# Altium PCB ServoShield.PcbDoc (part 2 of 3)
Units mm, origin at the board's own origin, x right, y up, seen from the top; angles counter-clockwise.
Board outline 82.5 x 82.5 mm, 2 copper layers (Top Layer, Bottom Layer); 43 components, 112 nets, 281 pads, 5423 vias.
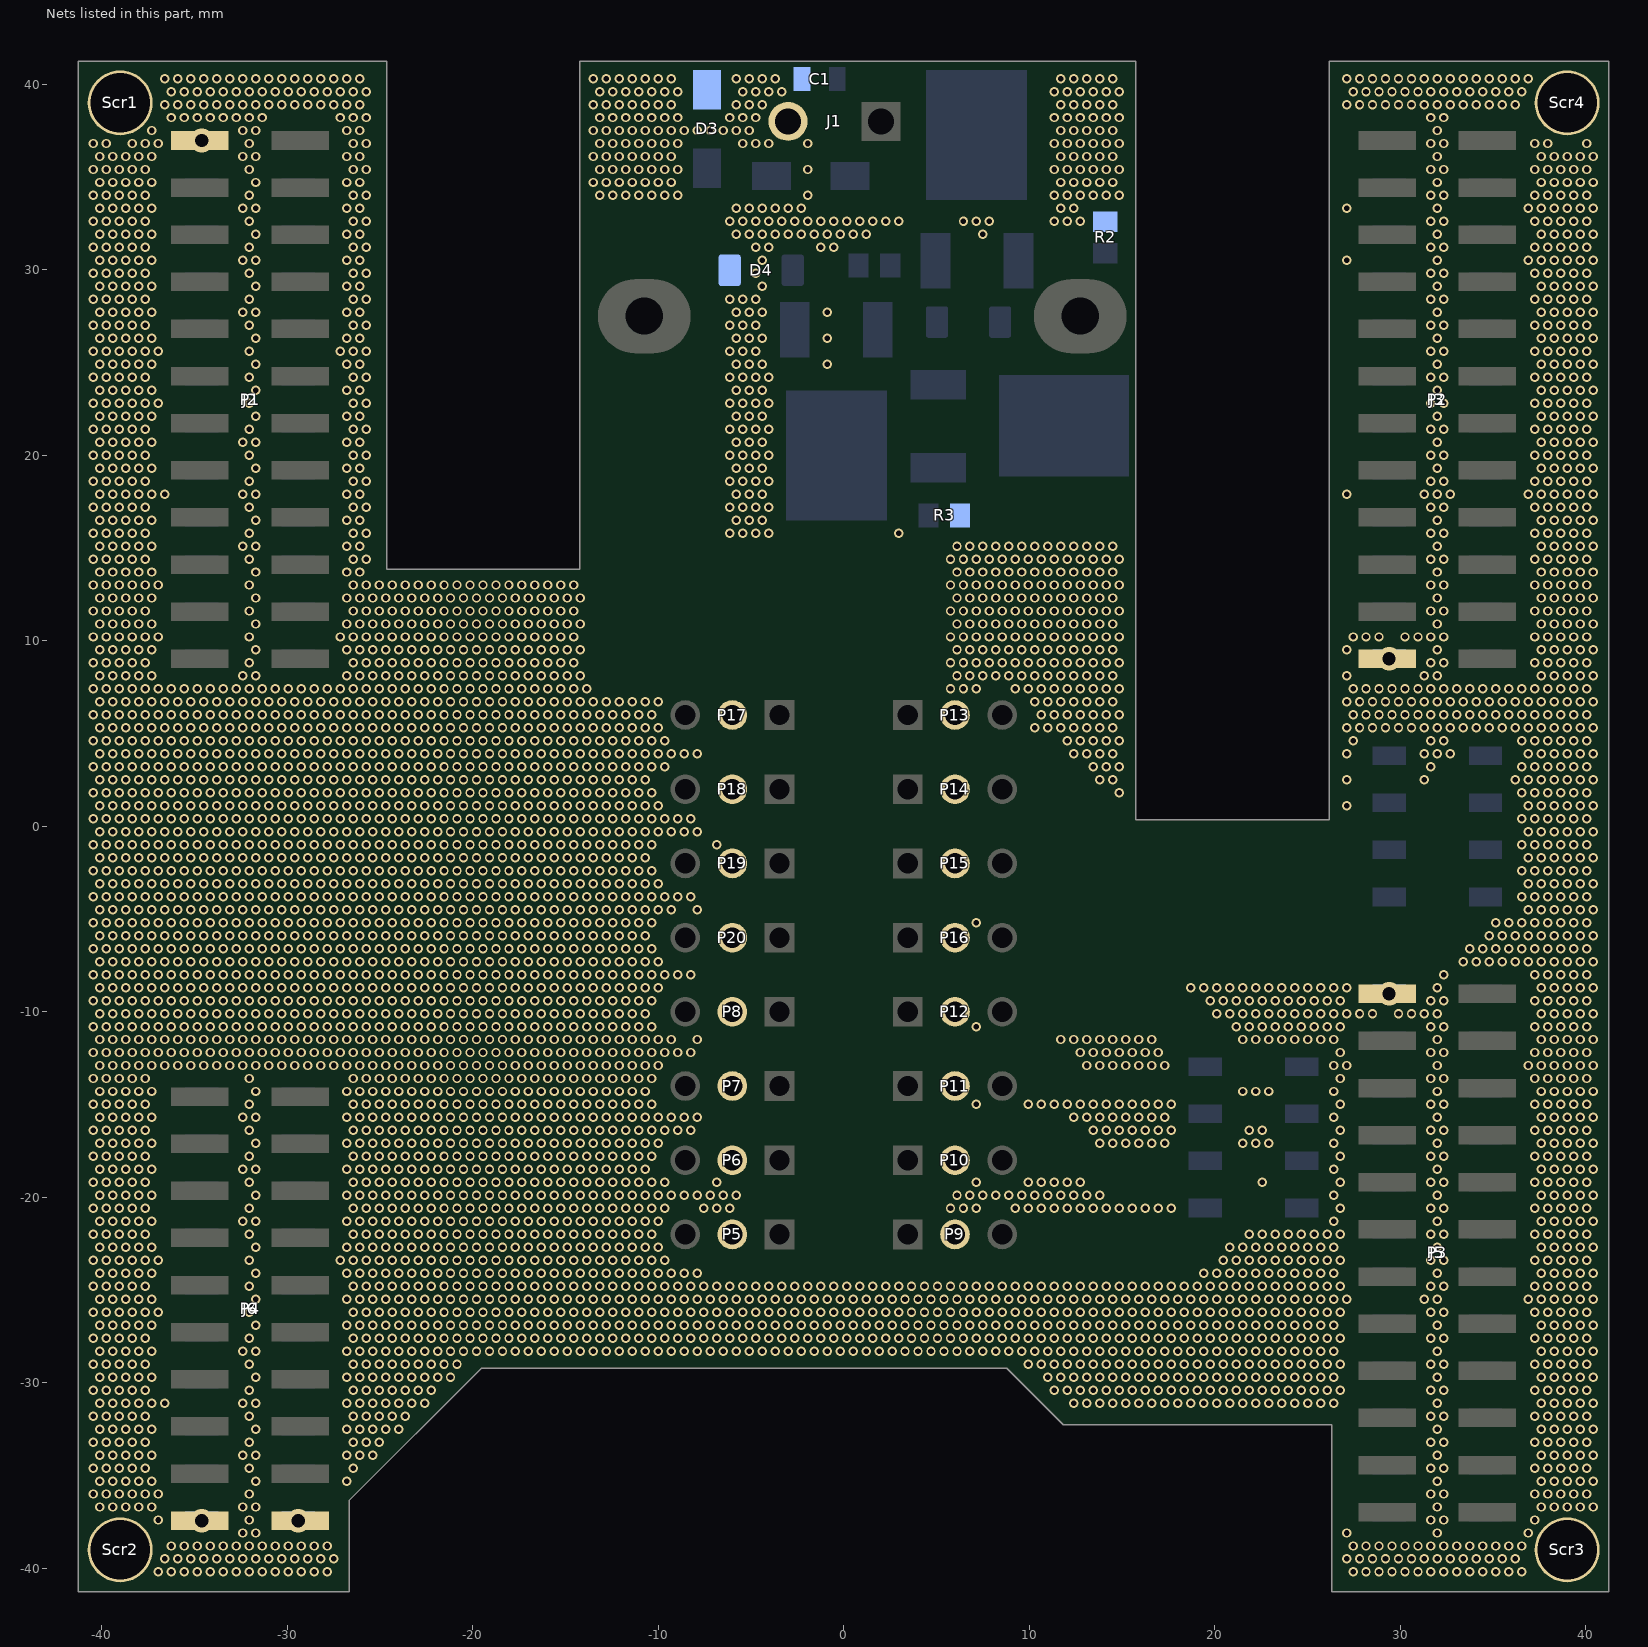
[diagram p2: the nets of this part, all layers, seen from the top]

## Via types
v1: diameter 0.508, hole 0.3, Top Layer to Bottom Layer, tented both sides, 5315 vias
v2: diameter 1.27, hole 0.711, Top Layer to Bottom Layer, 108 vias

## Nets (pads, with @x,y where several pads share a name; then routed paths per layer and width w, separated by ;. In a path a pad name is that pad's centre, name@x,y a point inside that pad or via, vN(x,y) a via of type N, cw(c..) or ccw(c..) an arc to the next point about the centre after c; other vN are vias at no path point) (continued)
GND: (continued)
  other v1: -36.943,-40.193 -36.243,-40.193 -35.543,-40.193 -34.843,-40.193 -34.143,-40.193 -33.443,-40.193 -32.743,-40.193 -32.043,-40.193 -31.343,-40.193 -30.643,-40.193 -29.943,-40.193 -29.243,-40.193 -28.543,-40.193 -27.843,-40.193 27.457,-40.193 28.157,-40.193 28.857,-40.193 29.557,-40.193 30.257,-40.193 30.957,-40.193 31.657,-40.193 32.357,-40.193 33.057,-40.193 33.757,-40.193 34.457,-40.193 35.157,-40.193 35.857,-40.193 36.557,-40.193 -36.593,-39.493 -35.893,-39.493 -35.193,-39.493 -34.493,-39.493 -33.793,-39.493 -33.093,-39.493 -32.393,-39.493 -31.693,-39.493 -30.993,-39.493 -30.293,-39.493 -29.593,-39.493 -28.893,-39.493 -28.193,-39.493 -27.493,-39.493 27.107,-39.493 27.807,-39.493 28.507,-39.493 29.207,-39.493 29.907,-39.493 30.607,-39.493 31.307,-39.493 32.007,-39.493 32.707,-39.493 33.407,-39.493 34.107,-39.493 34.807,-39.493 35.507,-39.493 36.207,-39.493 -36.243,-38.793 -35.543,-38.793 -34.843,-38.793 -34.143,-38.793 -33.443,-38.793 -32.743,-38.793 -32.043,-38.793 -31.343,-38.793 -30.643,-38.793 -29.943,-38.793 -29.243,-38.793 -28.543,-38.793 -27.843,-38.793 27.457,-38.793 28.157,-38.793 28.857,-38.793 29.557,-38.793 30.257,-38.793 30.957,-38.793 31.657,-38.793 32.357,-38.793 33.057,-38.793 33.757,-38.793 34.457,-38.793 35.157,-38.793 35.857,-38.793 36.557,-38.793 -32.393,-38.093 -31.693,-38.093 27.107,-38.093 32.007,-38.093 36.907,-38.093 -36.943,-37.393 -32.043,-37.393 31.657,-37.393 32.357,-37.393 37.257,-37.393 -40.093,-36.693 -39.393,-36.693 -38.693,-36.693 -37.993,-36.693 -37.293,-36.693 -32.393,-36.693 -31.693,-36.693 32.007,-36.693 37.607,-36.693 38.307,-36.693 39.007,-36.693 39.707,-36.693 40.407,-36.693 -40.443,-35.993 -39.743,-35.993 -39.043,-35.993 -38.343,-35.993 -37.643,-35.993 -36.943,-35.993 -32.043,-35.993 31.657,-35.993 32.357,-35.993 37.257,-35.993 37.957,-35.993 38.657,-35.993 39.357,-35.993 40.057,-35.993 -40.093,-35.293 -39.393,-35.293 -38.693,-35.293 -37.993,-35.293 -37.293,-35.293 -31.693,-35.293 -26.793,-35.293 32.007,-35.293 37.607,-35.293 38.307,-35.293 39.007,-35.293 39.707,-35.293 40.407,-35.293 -40.443,-34.593 -39.743,-34.593 -39.043,-34.593 -38.343,-34.593 -37.643,-34.593 -32.043,-34.593 -26.443,-34.593 31.657,-34.593 32.357,-34.593 37.257,-34.593 37.957,-34.593 38.657,-34.593 39.357,-34.593 40.057,-34.593 -40.093,-33.893 -39.393,-33.893 -38.693,-33.893 -37.993,-33.893 -37.293,-33.893 -32.393,-33.893 -31.693,-33.893 -26.793,-33.893 -26.093,-33.893 -25.393,-33.893 32.007,-33.893 37.607,-33.893 38.307,-33.893 39.007,-33.893 39.707,-33.893 40.407,-33.893 -40.443,-33.193 -39.743,-33.193 -39.043,-33.193 -38.343,-33.193 -37.643,-33.193 -32.043,-33.193 -26.443,-33.193 -25.743,-33.193 -25.043,-33.193 31.657,-33.193 32.357,-33.193 37.257,-33.193 37.957,-33.193 38.657,-33.193 39.357,-33.193 40.057,-33.193 -40.093,-32.493 -39.393,-32.493 -38.693,-32.493 -37.993,-32.493 -37.293,-32.493 -31.693,-32.493 -26.793,-32.493 -26.093,-32.493 -25.393,-32.493 -24.693,-32.493 -23.993,-32.493 32.007,-32.493 37.607,-32.493 38.307,-32.493 39.007,-32.493 39.707,-32.493 40.407,-32.493 -40.443,-31.793 -39.743,-31.793 -39.043,-31.793 -38.343,-31.793 -37.643,-31.793 -32.043,-31.793 -26.443,-31.793 -25.743,-31.793 -25.043,-31.793 -24.343,-31.793 -23.643,-31.793 31.657,-31.793 32.357,-31.793 37.257,-31.793 37.957,-31.793 38.657,-31.793 39.357,-31.793 40.057,-31.793 -40.093,-31.093 -39.393,-31.093 -38.693,-31.093 -37.993,-31.093 -37.293,-31.093 -36.593,-31.093 -32.393,-31.093 -31.693,-31.093 -26.793,-31.093 -26.093,-31.093 -25.393,-31.093 -24.693,-31.093 -23.993,-31.093 -23.293,-31.093 -22.593,-31.093 12.407,-31.093 13.107,-31.093 13.807,-31.093 14.507,-31.093 15.207,-31.093 15.907,-31.093 16.607,-31.093 17.307,-31.093 18.007,-31.093 18.707,-31.093 19.407,-31.093 20.107,-31.093 20.807,-31.093 21.507,-31.093 22.207,-31.093 22.907,-31.093 23.607,-31.093 24.307,-31.093 25.007,-31.093 25.707,-31.093 26.407,-31.093 32.007,-31.093 37.607,-31.093 38.307,-31.093 39.007,-31.093 39.707,-31.093 40.407,-31.093 -40.443,-30.393 -39.743,-30.393 -39.043,-30.393 -38.343,-30.393 -37.643,-30.393 -32.043,-30.393 -26.443,-30.393 -25.743,-30.393 -25.043,-30.393 -24.343,-30.393 -23.643,-30.393 -22.943,-30.393 -22.243,-30.393 11.357,-30.393 12.057,-30.393 12.757,-30.393 13.457,-30.393 14.157,-30.393 14.857,-30.393 15.557,-30.393 16.257,-30.393 16.957,-30.393 17.657,-30.393 18.357,-30.393 19.057,-30.393 19.757,-30.393 20.457,-30.393 21.157,-30.393 21.857,-30.393 22.557,-30.393 23.257,-30.393 23.957,-30.393 24.657,-30.393 25.357,-30.393 26.057,-30.393 26.757,-30.393 31.657,-30.393 32.357,-30.393 37.257,-30.393 37.957,-30.393 38.657,-30.393 39.357,-30.393 40.057,-30.393 -40.093,-29.693 -39.393,-29.693 -38.693,-29.693 -37.993,-29.693 -37.293,-29.693 -31.693,-29.693 -26.793,-29.693 -26.093,-29.693 -25.393,-29.693 -24.693,-29.693 -23.993,-29.693 -23.293,-29.693 -22.593,-29.693 -21.893,-29.693 -21.193,-29.693 11.007,-29.693 11.707,-29.693 12.407,-29.693 13.107,-29.693 13.807,-29.693 14.507,-29.693 15.207,-29.693 15.907,-29.693 16.607,-29.693 17.307,-29.693 18.007,-29.693 18.707,-29.693 19.407,-29.693 20.107,-29.693 20.807,-29.693 21.507,-29.693 22.207,-29.693 22.907,-29.693 23.607,-29.693 24.307,-29.693 25.007,-29.693 25.707,-29.693 26.407,-29.693 32.007,-29.693 37.607,-29.693 38.307,-29.693 39.007,-29.693 39.707,-29.693 40.407,-29.693 -40.443,-28.993 -39.743,-28.993 -39.043,-28.993 -38.343,-28.993 -37.643,-28.993 -32.043,-28.993 -26.443,-28.993 -25.743,-28.993 -25.043,-28.993 -24.343,-28.993 -23.643,-28.993 -22.943,-28.993 -22.243,-28.993 -21.543,-28.993 -20.843,-28.993 9.957,-28.993 10.657,-28.993 11.357,-28.993 12.057,-28.993 12.757,-28.993 13.457,-28.993 14.157,-28.993 14.857,-28.993 15.557,-28.993 16.257,-28.993 16.957,-28.993 17.657,-28.993 18.357,-28.993 19.057,-28.993 19.757,-28.993 20.457,-28.993 21.157,-28.993 21.857,-28.993 22.557,-28.993 23.257,-28.993 23.957,-28.993 24.657,-28.993 25.357,-28.993 26.057,-28.993 26.757,-28.993 31.657,-28.993 32.357,-28.993 37.257,-28.993 37.957,-28.993 38.657,-28.993 39.357,-28.993 40.057,-28.993 -40.093,-28.293 -39.393,-28.293 -38.693,-28.293 -37.993,-28.293 -37.293,-28.293 -32.393,-28.293 -31.693,-28.293 -26.793,-28.293 -26.093,-28.293 -25.393,-28.293 -24.693,-28.293 -23.993,-28.293 -23.293,-28.293 -22.593,-28.293 -21.893,-28.293 -21.193,-28.293 -20.493,-28.293 -19.793,-28.293 -19.093,-28.293 -18.393,-28.293 -17.693,-28.293 -16.993,-28.293 -16.293,-28.293 -15.593,-28.293 -14.893,-28.293 -14.193,-28.293 -13.493,-28.293 -12.793,-28.293 -12.093,-28.293 -11.393,-28.293 -10.693,-28.293 -9.993,-28.293 -9.293,-28.293 -8.593,-28.293 -7.893,-28.293 -7.193,-28.293 -6.493,-28.293 -5.793,-28.293 -5.093,-28.293 -4.393,-28.293 -3.693,-28.293 -2.993,-28.293 -2.293,-28.293 -1.593,-28.293 -0.893,-28.293 -0.193,-28.293 0.507,-28.293 1.207,-28.293 1.907,-28.293 2.607,-28.293 3.307,-28.293 4.007,-28.293 4.707,-28.293 5.407,-28.293 6.107,-28.293 6.807,-28.293 7.507,-28.293 8.207,-28.293 8.907,-28.293 9.607,-28.293 10.307,-28.293 11.007,-28.293 11.707,-28.293 12.407,-28.293 13.107,-28.293 13.807,-28.293 14.507,-28.293 15.207,-28.293 15.907,-28.293 16.607,-28.293 17.307,-28.293 18.007,-28.293 18.707,-28.293 19.407,-28.293 20.107,-28.293 20.807,-28.293 21.507,-28.293 22.207,-28.293 22.907,-28.293 23.607,-28.293 24.307,-28.293 25.007,-28.293 25.707,-28.293 26.407,-28.293 32.007,-28.293 37.607,-28.293 38.307,-28.293 39.007,-28.293 39.707,-28.293 40.407,-28.293 -40.443,-27.593 -39.743,-27.593 -39.043,-27.593 -38.343,-27.593 -37.643,-27.593 -32.043,-27.593 -26.443,-27.593 -25.743,-27.593 -25.043,-27.593 -24.343,-27.593 -23.643,-27.593 -22.943,-27.593 -22.243,-27.593 -21.543,-27.593 -20.843,-27.593 -20.143,-27.593 -19.443,-27.593 -18.743,-27.593 -18.043,-27.593 -17.343,-27.593 -16.643,-27.593 -15.943,-27.593 -15.243,-27.593 -14.543,-27.593 -13.843,-27.593 -13.143,-27.593 -12.443,-27.593 -11.743,-27.593 -11.043,-27.593 -10.343,-27.593 -9.643,-27.593 -8.943,-27.593 -8.243,-27.593 -7.543,-27.593 -6.843,-27.593 -6.143,-27.593 -5.443,-27.593 -4.743,-27.593 -4.043,-27.593 -3.343,-27.593 -2.643,-27.593 -1.943,-27.593 -1.243,-27.593 -0.543,-27.593 0.157,-27.593 0.857,-27.593 1.557,-27.593 2.257,-27.593 2.957,-27.593 3.657,-27.593 4.357,-27.593 5.057,-27.593 5.757,-27.593 6.457,-27.593 7.157,-27.593 7.857,-27.593 8.557,-27.593 9.257,-27.593 9.957,-27.593 10.657,-27.593 11.357,-27.593 12.057,-27.593 12.757,-27.593 13.457,-27.593 14.157,-27.593 14.857,-27.593 15.557,-27.593 16.257,-27.593 16.957,-27.593 17.657,-27.593 18.357,-27.593 19.057,-27.593 19.757,-27.593 20.457,-27.593 21.157,-27.593 21.857,-27.593 22.557,-27.593 23.257,-27.593 23.957,-27.593 24.657,-27.593 25.357,-27.593 26.057,-27.593 26.757,-27.593 31.657,-27.593 32.357,-27.593 37.257,-27.593 37.957,-27.593 38.657,-27.593 39.357,-27.593 40.057,-27.593 -40.093,-26.893 -39.393,-26.893 -38.693,-26.893 -37.993,-26.893 -37.293,-26.893 -31.693,-26.893 -26.793,-26.893 -26.093,-26.893 -25.393,-26.893 -24.693,-26.893 -23.993,-26.893 -23.293,-26.893 -22.593,-26.893 -21.893,-26.893 -21.193,-26.893 -20.493,-26.893 -19.793,-26.893 -19.093,-26.893 -18.393,-26.893 -17.693,-26.893 -16.993,-26.893 -16.293,-26.893 -15.593,-26.893 -14.893,-26.893 -14.193,-26.893 -13.493,-26.893 -12.793,-26.893 -12.093,-26.893 -11.393,-26.893 -10.693,-26.893 -9.993,-26.893 -9.293,-26.893 -8.593,-26.893 -7.893,-26.893 -7.193,-26.893 -6.493,-26.893 -5.793,-26.893 -5.093,-26.893 -4.393,-26.893 -3.693,-26.893 -2.993,-26.893 -2.293,-26.893 -1.593,-26.893 -0.893,-26.893 -0.193,-26.893 0.507,-26.893 1.207,-26.893 1.907,-26.893 2.607,-26.893 3.307,-26.893 4.007,-26.893 4.707,-26.893 5.407,-26.893 6.107,-26.893 6.807,-26.893 7.507,-26.893 8.207,-26.893 8.907,-26.893 9.607,-26.893 10.307,-26.893 11.007,-26.893 11.707,-26.893 12.407,-26.893 13.107,-26.893 13.807,-26.893 14.507,-26.893 15.207,-26.893 15.907,-26.893 16.607,-26.893 17.307,-26.893 18.007,-26.893 18.707,-26.893 19.407,-26.893 20.107,-26.893 20.807,-26.893 21.507,-26.893 22.207,-26.893 22.907,-26.893 23.607,-26.893 24.307,-26.893 25.007,-26.893 25.707,-26.893 26.407,-26.893 32.007,-26.893 37.607,-26.893 38.307,-26.893 39.007,-26.893 39.707,-26.893 40.407,-26.893 -40.443,-26.193 -39.743,-26.193 -39.043,-26.193 -38.343,-26.193 -37.643,-26.193 -36.943,-26.193 -32.043,-26.193 -26.443,-26.193 -25.743,-26.193 -25.043,-26.193 -24.343,-26.193 -23.643,-26.193 -22.943,-26.193 -22.243,-26.193 -21.543,-26.193 -20.843,-26.193 -20.143,-26.193 -19.443,-26.193 -18.743,-26.193 -18.043,-26.193 -17.343,-26.193 -16.643,-26.193 -15.943,-26.193 -15.243,-26.193 -14.543,-26.193 -13.843,-26.193 -13.143,-26.193 -12.443,-26.193 -11.743,-26.193 -11.043,-26.193 -10.343,-26.193 -9.643,-26.193 -8.943,-26.193 -8.243,-26.193 -7.543,-26.193 -6.843,-26.193 -6.143,-26.193 -5.443,-26.193 -4.743,-26.193 -4.043,-26.193 -3.343,-26.193 -2.643,-26.193 -1.943,-26.193 -1.243,-26.193 -0.543,-26.193 0.157,-26.193 0.857,-26.193 1.557,-26.193 2.257,-26.193 2.957,-26.193 3.657,-26.193 4.357,-26.193 5.057,-26.193 5.757,-26.193 6.457,-26.193 7.157,-26.193 7.857,-26.193 8.557,-26.193 9.257,-26.193 9.957,-26.193 10.657,-26.193 11.357,-26.193 12.057,-26.193 12.757,-26.193 13.457,-26.193 14.157,-26.193 14.857,-26.193 15.557,-26.193 16.257,-26.193 16.957,-26.193 17.657,-26.193 18.357,-26.193 19.057,-26.193 19.757,-26.193 20.457,-26.193 21.157,-26.193 21.857,-26.193 22.557,-26.193 23.257,-26.193 23.957,-26.193 24.657,-26.193 25.357,-26.193 26.057,-26.193 26.757,-26.193 31.657,-26.193 32.357,-26.193 37.257,-26.193 37.957,-26.193 38.657,-26.193 39.357,-26.193 40.057,-26.193 -40.093,-25.493 -39.393,-25.493 -38.693,-25.493 -37.993,-25.493 -37.293,-25.493 -31.693,-25.493 -26.793,-25.493 -26.093,-25.493 -25.393,-25.493 -24.693,-25.493 -23.993,-25.493 -23.293,-25.493 -22.593,-25.493 -21.893,-25.493 -21.193,-25.493 -20.493,-25.493 -19.793,-25.493 -19.093,-25.493 -18.393,-25.493 -17.693,-25.493 -16.993,-25.493 -16.293,-25.493 -15.593,-25.493 -14.893,-25.493 -14.193,-25.493 -13.493,-25.493 -12.793,-25.493 -12.093,-25.493 -11.393,-25.493 -10.693,-25.493 -9.993,-25.493 -9.293,-25.493 -8.593,-25.493 -7.893,-25.493 -7.193,-25.493 -6.493,-25.493 -5.793,-25.493 -5.093,-25.493 -4.393,-25.493 -3.693,-25.493 -2.993,-25.493 -2.293,-25.493 -1.593,-25.493 -0.893,-25.493 -0.193,-25.493 0.507,-25.493 1.207,-25.493 1.907,-25.493 2.607,-25.493 3.307,-25.493 4.007,-25.493 4.707,-25.493 5.407,-25.493 6.107,-25.493 6.807,-25.493 7.507,-25.493 8.207,-25.493 8.907,-25.493 9.607,-25.493 10.307,-25.493 11.007,-25.493 11.707,-25.493 12.407,-25.493 13.107,-25.493 13.807,-25.493 14.507,-25.493 15.207,-25.493 15.907,-25.493 16.607,-25.493 17.307,-25.493 18.007,-25.493 18.707,-25.493 19.407,-25.493 20.107,-25.493 20.807,-25.493 21.507,-25.493 22.207,-25.493 22.907,-25.493 23.607,-25.493 24.307,-25.493 25.007,-25.493 25.707,-25.493 26.407,-25.493 27.107,-25.493 31.307,-25.493 32.007,-25.493 36.907,-25.493 37.607,-25.493 38.307,-25.493 39.007,-25.493 39.707,-25.493 40.407,-25.493 -40.443,-24.793 -39.743,-24.793 -39.043,-24.793 -38.343,-24.793 -37.643,-24.793 -32.043,-24.793 -26.443,-24.793 -25.743,-24.793 -25.043,-24.793 -24.343,-24.793 -23.643,-24.793 -22.943,-24.793 -22.243,-24.793 -21.543,-24.793 -20.843,-24.793 -20.143,-24.793 -19.443,-24.793 -18.743,-24.793 -18.043,-24.793 -17.343,-24.793 -16.643,-24.793 -15.943,-24.793 -15.243,-24.793 -14.543,-24.793 -13.843,-24.793 -13.143,-24.793 -12.443,-24.793 -11.743,-24.793 -11.043,-24.793 -10.343,-24.793 -9.643,-24.793 -8.943,-24.793 -8.243,-24.793 -7.543,-24.793 -6.843,-24.793 -6.143,-24.793 -5.443,-24.793 -4.743,-24.793 -4.043,-24.793 -3.343,-24.793 -2.643,-24.793 -1.943,-24.793 -1.243,-24.793 -0.543,-24.793 0.157,-24.793 0.857,-24.793 1.557,-24.793 2.257,-24.793 2.957,-24.793 3.657,-24.793 4.357,-24.793 5.057,-24.793 5.757,-24.793 6.457,-24.793 7.157,-24.793 7.857,-24.793 8.557,-24.793 9.257,-24.793 9.957,-24.793 10.657,-24.793 11.357,-24.793 12.057,-24.793 12.757,-24.793 13.457,-24.793 14.157,-24.793 14.857,-24.793 15.557,-24.793 16.257,-24.793 16.957,-24.793 17.657,-24.793 18.357,-24.793 19.057,-24.793 19.757,-24.793 20.457,-24.793 21.157,-24.793 21.857,-24.793 22.557,-24.793 23.257,-24.793 23.957,-24.793 24.657,-24.793 25.357,-24.793 26.057,-24.793 26.757,-24.793 31.657,-24.793 32.357,-24.793 37.257,-24.793 37.957,-24.793 38.657,-24.793 39.357,-24.793 40.057,-24.793 -40.093,-24.093 -39.393,-24.093 -38.693,-24.093 -37.993,-24.093 -37.293,-24.093 -31.693,-24.093 -26.793,-24.093 -26.093,-24.093 -25.393,-24.093 -24.693,-24.093 -23.993,-24.093 -23.293,-24.093 -22.593,-24.093 -21.893,-24.093 -21.193,-24.093 -20.493,-24.093 -19.793,-24.093 -19.093,-24.093 -18.393,-24.093 -17.693,-24.093 -16.993,-24.093 -16.293,-24.093 -15.593,-24.093 -14.893,-24.093 -14.193,-24.093 -13.493,-24.093 -12.793,-24.093 -12.093,-24.093 -11.393,-24.093 -10.693,-24.093 -9.993,-24.093 -9.293,-24.093 -8.593,-24.093 -7.893,-24.093 19.407,-24.093 20.107,-24.093 20.807,-24.093 21.507,-24.093 22.207,-24.093 22.907,-24.093 23.607,-24.093 24.307,-24.093 25.007,-24.093 25.707,-24.093 26.407,-24.093 32.007,-24.093 37.607,-24.093 38.307,-24.093 39.007,-24.093 39.707,-24.093 40.407,-24.093 -40.443,-23.393 -39.743,-23.393 -39.043,-23.393 -38.343,-23.393 -37.643,-23.393 -36.943,-23.393 -32.043,-23.393 -27.143,-23.393 -26.443,-23.393 -25.743,-23.393 -25.043,-23.393 -24.343,-23.393 -23.643,-23.393 -22.943,-23.393 -22.243,-23.393 -21.543,-23.393 -20.843,-23.393 -20.143,-23.393 -19.443,-23.393 -18.743,-23.393 -18.043,-23.393 -17.343,-23.393 -16.643,-23.393 -15.943,-23.393 -15.243,-23.393 -14.543,-23.393 -13.843,-23.393 -13.143,-23.393 -12.443,-23.393 -11.743,-23.393 -11.043,-23.393 -10.343,-23.393 -9.643,-23.393 20.457,-23.393 21.157,-23.393 21.857,-23.393 22.557,-23.393 23.257,-23.393 23.957,-23.393 24.657,-23.393 25.357,-23.393 26.057,-23.393 26.757,-23.393 31.657,-23.393 32.357,-23.393 37.257,-23.393 37.957,-23.393 38.657,-23.393 39.357,-23.393 40.057,-23.393 -40.093,-22.693 -39.393,-22.693 -38.693,-22.693 -37.993,-22.693 -37.293,-22.693 -31.693,-22.693 -26.793,-22.693 -26.093,-22.693 -25.393,-22.693 -24.693,-22.693 -23.993,-22.693 -23.293,-22.693 -22.593,-22.693 -21.893,-22.693 -21.193,-22.693 -20.493,-22.693 -19.793,-22.693 -19.093,-22.693 -18.393,-22.693 -17.693,-22.693 -16.993,-22.693 -16.293,-22.693 -15.593,-22.693 -14.893,-22.693 -14.193,-22.693 -13.493,-22.693 -12.793,-22.693 -12.093,-22.693 -11.393,-22.693 -10.693,-22.693 -9.993,-22.693 20.807,-22.693 21.507,-22.693 22.207,-22.693 22.907,-22.693 23.607,-22.693 24.307,-22.693 25.007,-22.693 25.707,-22.693 26.407,-22.693 32.007,-22.693 37.607,-22.693 38.307,-22.693 39.007,-22.693 39.707,-22.693 40.407,-22.693 -40.443,-21.993 -39.743,-21.993 -39.043,-21.993 -38.343,-21.993 -37.643,-21.993 -32.043,-21.993 -26.443,-21.993 -25.743,-21.993 -25.043,-21.993 -24.343,-21.993 -23.643,-21.993 -22.943,-21.993 -22.243,-21.993 -21.543,-21.993 -20.843,-21.993 -20.143,-21.993 -19.443,-21.993 -18.743,-21.993 -18.043,-21.993 -17.343,-21.993 -16.643,-21.993 -15.943,-21.993 -15.243,-21.993 -14.543,-21.993 -13.843,-21.993 -13.143,-21.993 -12.443,-21.993 -11.743,-21.993 -11.043,-21.993 -10.343,-21.993 21.857,-21.993 22.557,-21.993 23.257,-21.993 23.957,-21.993 24.657,-21.993 25.357,-21.993 26.057,-21.993 26.757,-21.993 31.657,-21.993 32.357,-21.993 37.257,-21.993 37.957,-21.993 38.657,-21.993 39.357,-21.993 40.057,-21.993 -40.093,-21.293 -39.393,-21.293 -38.693,-21.293 -37.993,-21.293 -37.293,-21.293 -32.393,-21.293 -31.693,-21.293 -26.793,-21.293 -26.093,-21.293 -25.393,-21.293 -24.693,-21.293 -23.993,-21.293 -23.293,-21.293 -22.593,-21.293 -21.893,-21.293 -21.193,-21.293 -20.493,-21.293 -19.793,-21.293 -19.093,-21.293 -18.393,-21.293 -17.693,-21.293 -16.993,-21.293 -16.293,-21.293 -15.593,-21.293 -14.893,-21.293 -14.193,-21.293 -13.493,-21.293 -12.793,-21.293 -12.093,-21.293 -11.393,-21.293 -10.693,-21.293 -9.993,-21.293 26.407,-21.293 32.007,-21.293 37.607,-21.293 38.307,-21.293 39.007,-21.293 39.707,-21.293 40.407,-21.293 -40.443,-20.593 -39.743,-20.593 -39.043,-20.593 -38.343,-20.593 -37.643,-20.593 -32.043,-20.593 -26.443,-20.593 -25.743,-20.593 -25.043,-20.593 -24.343,-20.593 -23.643,-20.593 -22.943,-20.593 -22.243,-20.593 -21.543,-20.593 -20.843,-20.593 -20.143,-20.593 -19.443,-20.593 -18.743,-20.593 -18.043,-20.593 -17.343,-20.593 -16.643,-20.593 -15.943,-20.593 -15.243,-20.593 -14.543,-20.593 -13.843,-20.593 -13.143,-20.593 -12.443,-20.593 -11.743,-20.593 -11.043,-20.593 -10.343,-20.593 -9.643,-20.593 -7.543,-20.593 -6.843,-20.593 -6.143,-20.593 5.757,-20.593 6.457,-20.593 7.157,-20.593 9.257,-20.593 9.957,-20.593 10.657,-20.593 11.357,-20.593 12.057,-20.593 12.757,-20.593 13.457,-20.593 14.157,-20.593 14.857,-20.593 15.557,-20.593 16.257,-20.593 16.957,-20.593 17.657,-20.593 26.757,-20.593 31.657,-20.593 32.357,-20.593 37.257,-20.593 37.957,-20.593 38.657,-20.593 39.357,-20.593 40.057,-20.593 -40.093,-19.893 -39.393,-19.893 -38.693,-19.893 -37.993,-19.893 -37.293,-19.893 -31.693,-19.893 -26.793,-19.893 -26.093,-19.893 -25.393,-19.893 -24.693,-19.893 -23.993,-19.893 -23.293,-19.893 -22.593,-19.893 -21.893,-19.893 -21.193,-19.893 -20.493,-19.893 -19.793,-19.893 -19.093,-19.893 -18.393,-19.893 -17.693,-19.893 -16.993,-19.893 -16.293,-19.893 -15.593,-19.893 -14.893,-19.893 -14.193,-19.893 -13.493,-19.893 -12.793,-19.893 -12.093,-19.893 -11.393,-19.893 -10.693,-19.893 -9.993,-19.893 -9.293,-19.893 -8.593,-19.893 -7.893,-19.893 -7.193,-19.893 -6.493,-19.893 -5.793,-19.893 6.107,-19.893 6.807,-19.893 7.507,-19.893 8.207,-19.893 8.907,-19.893 9.607,-19.893 10.307,-19.893 11.007,-19.893 11.707,-19.893 12.407,-19.893 13.107,-19.893 13.807,-19.893 26.407,-19.893 32.007,-19.893 37.607,-19.893 38.307,-19.893 39.007,-19.893 39.707,-19.893 40.407,-19.893 -40.443,-19.193 -39.743,-19.193 -39.043,-19.193 -38.343,-19.193 -37.643,-19.193 -32.043,-19.193 -26.443,-19.193 -25.743,-19.193 -25.043,-19.193 -24.343,-19.193 -23.643,-19.193 -22.943,-19.193 -22.243,-19.193 -21.543,-19.193 -20.843,-19.193 -20.143,-19.193 -19.443,-19.193 -18.743,-19.193 -18.043,-19.193 -17.343,-19.193 -16.643,-19.193 -15.943,-19.193 -15.243,-19.193 -14.543,-19.193 -13.843,-19.193 -13.143,-19.193 -12.443,-19.193 -11.743,-19.193 -11.043,-19.193 -10.343,-19.193 -9.643,-19.193 -6.843,-19.193 7.157,-19.193 9.957,-19.193 10.657,-19.193 11.357,-19.193 12.057,-19.193 12.757,-19.193 22.557,-19.193 26.757,-19.193 31.657,-19.193 32.357,-19.193 37.257,-19.193 37.957,-19.193 38.657,-19.193 39.357,-19.193 40.057,-19.193 -40.093,-18.493 -39.393,-18.493 -38.693,-18.493 -37.993,-18.493 -37.293,-18.493 -32.393,-18.493 -31.693,-18.493 -26.793,-18.493 -26.093,-18.493 -25.393,-18.493 -24.693,-18.493 -23.993,-18.493 -23.293,-18.493 -22.593,-18.493 -21.893,-18.493 -21.193,-18.493 -20.493,-18.493 -19.793,-18.493 -19.093,-18.493 -18.393,-18.493 -17.693,-18.493 -16.993,-18.493 -16.293,-18.493 -15.593,-18.493 -14.893,-18.493 -14.193,-18.493 -13.493,-18.493 -12.793,-18.493 -12.093,-18.493 -11.393,-18.493 -10.693,-18.493 26.407,-18.493 32.007,-18.493 37.607,-18.493 38.307,-18.493 39.007,-18.493 39.707,-18.493 40.407,-18.493 -40.443,-17.793 -39.743,-17.793 -39.043,-17.793 -38.343,-17.793 -37.643,-17.793 -32.043,-17.793 -26.443,-17.793 -25.743,-17.793 -25.043,-17.793 -24.343,-17.793 -23.643,-17.793 -22.943,-17.793 -22.243,-17.793 -21.543,-17.793 -20.843,-17.793 -20.143,-17.793 -19.443,-17.793 -18.743,-17.793 -18.043,-17.793 -17.343,-17.793 -16.643,-17.793 -15.943,-17.793 -15.243,-17.793 -14.543,-17.793 -13.843,-17.793 -13.143,-17.793 -12.443,-17.793 -11.743,-17.793 -11.043,-17.793 -10.343,-17.793 26.757,-17.793 31.657,-17.793 32.357,-17.793 37.257,-17.793 37.957,-17.793 38.657,-17.793 39.357,-17.793 40.057,-17.793 -40.093,-17.093 -39.393,-17.093 -38.693,-17.093 -37.993,-17.093 -37.293,-17.093 -31.693,-17.093 -26.793,-17.093 -26.093,-17.093 -25.393,-17.093 -24.693,-17.093 -23.993,-17.093 -23.293,-17.093 -22.593,-17.093 -21.893,-17.093 -21.193,-17.093 -20.493,-17.093 -19.793,-17.093 -19.093,-17.093 -18.393,-17.093 -17.693,-17.093 -16.993,-17.093 -16.293,-17.093 -15.593,-17.093 -14.893,-17.093 -14.193,-17.093 -13.493,-17.093 -12.793,-17.093 -12.093,-17.093 -11.393,-17.093 -10.693,-17.093 -9.993,-17.093 13.807,-17.093 14.507,-17.093 15.207,-17.093 15.907,-17.093 16.607,-17.093 17.307,-17.093 21.507,-17.093 22.207,-17.093 22.907,-17.093 26.407,-17.093 32.007,-17.093 37.607,-17.093 38.307,-17.093 39.007,-17.093 39.707,-17.093 40.407,-17.093 -40.443,-16.393 -39.743,-16.393 -39.043,-16.393 -38.343,-16.393 -37.643,-16.393 -32.043,-16.393 -26.443,-16.393 -25.743,-16.393 -25.043,-16.393 -24.343,-16.393 -23.643,-16.393 -22.943,-16.393 -22.243,-16.393 -21.543,-16.393 -20.843,-16.393 -20.143,-16.393 -19.443,-16.393 -18.743,-16.393 -18.043,-16.393 -17.343,-16.393 -16.643,-16.393 -15.943,-16.393 -15.243,-16.393 -14.543,-16.393 -13.843,-16.393 -13.143,-16.393 -12.443,-16.393 -11.743,-16.393 -11.043,-16.393 -10.343,-16.393 -9.643,-16.393 -8.943,-16.393 -8.243,-16.393 13.457,-16.393 14.157,-16.393 14.857,-16.393 15.557,-16.393 16.257,-16.393 16.957,-16.393 17.657,-16.393 21.857,-16.393 22.557,-16.393 26.757,-16.393 31.657,-16.393 32.357,-16.393 37.257,-16.393 37.957,-16.393 38.657,-16.393 39.357,-16.393 40.057,-16.393 -40.093,-15.693 -39.393,-15.693 -38.693,-15.693 -37.993,-15.693 -37.293,-15.693 -32.393,-15.693 -31.693,-15.693 -26.793,-15.693 -26.093,-15.693 -25.393,-15.693 -24.693,-15.693 -23.993,-15.693 -23.293,-15.693 -22.593,-15.693 -21.893,-15.693 -21.193,-15.693 -20.493,-15.693 -19.793,-15.693 -19.093,-15.693 -18.393,-15.693 -17.693,-15.693 -16.993,-15.693 -16.293,-15.693 -15.593,-15.693 -14.893,-15.693 -14.193,-15.693 -13.493,-15.693 -12.793,-15.693 -12.093,-15.693 -11.393,-15.693 -10.693,-15.693 -9.993,-15.693 -9.293,-15.693 -8.593,-15.693 -7.893,-15.693 12.407,-15.693 13.107,-15.693 13.807,-15.693 14.507,-15.693 15.207,-15.693 15.907,-15.693 16.607,-15.693 17.307,-15.693 26.407,-15.693 32.007,-15.693 37.607,-15.693 38.307,-15.693 39.007,-15.693 39.707,-15.693 40.407,-15.693 -40.443,-14.993 -39.743,-14.993 -39.043,-14.993 -38.343,-14.993 -37.643,-14.993 -32.043,-14.993 -26.443,-14.993 -25.743,-14.993 -25.043,-14.993 -24.343,-14.993 -23.643,-14.993 -22.943,-14.993 -22.243,-14.993 -21.543,-14.993 -20.843,-14.993 -20.143,-14.993 -19.443,-14.993 -18.743,-14.993 -18.043,-14.993 -17.343,-14.993 -16.643,-14.993 -15.943,-14.993 -15.243,-14.993 -14.543,-14.993 -13.843,-14.993 -13.143,-14.993 -12.443,-14.993 -11.743,-14.993 -11.043,-14.993 -10.343,-14.993 7.157,-14.993 9.957,-14.993 10.657,-14.993 11.357,-14.993 12.057,-14.993 12.757,-14.993 13.457,-14.993 14.157,-14.993 14.857,-14.993 15.557,-14.993 16.257,-14.993 16.957,-14.993 17.657,-14.993 26.757,-14.993 31.657,-14.993 32.357,-14.993 37.257,-14.993 37.957,-14.993 38.657,-14.993 39.357,-14.993 40.057,-14.993 -40.093,-14.293 -39.393,-14.293 -38.693,-14.293 -37.993,-14.293 -37.293,-14.293 -31.693,-14.293 -26.793,-14.293 -26.093,-14.293 -25.393,-14.293 -24.693,-14.293 -23.993,-14.293 -23.293,-14.293 -22.593,-14.293 -21.893,-14.293 -21.193,-14.293 -20.493,-14.293 -19.793,-14.293 -19.093,-14.293 -18.393,-14.293 -17.693,-14.293 -16.993,-14.293 -16.293,-14.293 -15.593,-14.293 -14.893,-14.293 -14.193,-14.293 -13.493,-14.293 -12.793,-14.293 -12.093,-14.293 -11.393,-14.293 -10.693,-14.293 21.507,-14.293 22.207,-14.293 22.907,-14.293 26.407,-14.293 32.007,-14.293 37.607,-14.293 38.307,-14.293 39.007,-14.293 39.707,-14.293 40.407,-14.293 -40.443,-13.593 -39.743,-13.593 -39.043,-13.593 -38.343,-13.593 -37.643,-13.593 -32.043,-13.593 -26.443,-13.593 -25.743,-13.593 -25.043,-13.593 -24.343,-13.593 -23.643,-13.593 -22.943,-13.593 -22.243,-13.593 -21.543,-13.593 -20.843,-13.593 -20.143,-13.593 -19.443,-13.593 -18.743,-13.593 -18.043,-13.593 -17.343,-13.593 -16.643,-13.593 -15.943,-13.593 -15.243,-13.593 -14.543,-13.593 -13.843,-13.593 -13.143,-13.593 -12.443,-13.593 -11.743,-13.593 -11.043,-13.593 -10.343,-13.593 26.757,-13.593 31.657,-13.593 32.357,-13.593 37.257,-13.593 37.957,-13.593 38.657,-13.593 39.357,-13.593 40.057,-13.593 -40.093,-12.893 -39.393,-12.893 -38.693,-12.893 -37.993,-12.893 -37.293,-12.893 -36.593,-12.893 -35.893,-12.893 -35.193,-12.893 -34.493,-12.893 -33.793,-12.893 -33.093,-12.893 -32.393,-12.893 -31.693,-12.893 -30.993,-12.893 -30.293,-12.893 -29.593,-12.893 -28.893,-12.893 -28.193,-12.893 -27.493,-12.893 -26.793,-12.893 -26.093,-12.893 -25.393,-12.893 -24.693,-12.893 -23.993,-12.893 -23.293,-12.893 -22.593,-12.893 -21.893,-12.893 -21.193,-12.893 -20.493,-12.893 -19.793,-12.893 -19.093,-12.893 -18.393,-12.893 -17.693,-12.893 -16.993,-12.893 -16.293,-12.893 -15.593,-12.893 -14.893,-12.893 -14.193,-12.893 -13.493,-12.893 -12.793,-12.893 -12.093,-12.893 -11.393,-12.893 -10.693,-12.893 -9.993,-12.893 13.107,-12.893 13.807,-12.893 14.507,-12.893 15.207,-12.893 15.907,-12.893 16.607,-12.893 17.307,-12.893 26.407,-12.893 27.107,-12.893 32.007,-12.893 36.907,-12.893 37.607,-12.893 38.307,-12.893 39.007,-12.893 39.707,-12.893 40.407,-12.893 -40.443,-12.193 -39.743,-12.193 -39.043,-12.193 -38.343,-12.193 -37.643,-12.193 -36.943,-12.193 -36.243,-12.193 -35.543,-12.193 -34.843,-12.193 -34.143,-12.193 -33.443,-12.193 -32.743,-12.193 -32.043,-12.193 -31.343,-12.193 -30.643,-12.193 -29.943,-12.193 -29.243,-12.193 -28.543,-12.193 -27.843,-12.193 -27.143,-12.193 -26.443,-12.193 -25.743,-12.193 -25.043,-12.193 -24.343,-12.193 -23.643,-12.193 -22.943,-12.193 -22.243,-12.193 -21.543,-12.193 -20.843,-12.193 -20.143,-12.193 -19.443,-12.193 -18.743,-12.193 -18.043,-12.193 -17.343,-12.193 -16.643,-12.193 -15.943,-12.193 -15.243,-12.193 -14.543,-12.193 -13.843,-12.193 -13.143,-12.193 -12.443,-12.193 -11.743,-12.193 -11.043,-12.193 -10.343,-12.193 -9.643,-12.193 -8.943,-12.193 -8.243,-12.193 12.757,-12.193 13.457,-12.193 14.157,-12.193 14.857,-12.193 15.557,-12.193 16.257,-12.193 16.957,-12.193 26.757,-12.193 31.657,-12.193 32.357,-12.193 37.257,-12.193 37.957,-12.193 38.657,-12.193 39.357,-12.193 40.057,-12.193 -40.093,-11.493 -39.393,-11.493 -38.693,-11.493 -37.993,-11.493 -37.293,-11.493 -36.593,-11.493 -35.893,-11.493 -35.193,-11.493 -34.493,-11.493 -33.793,-11.493 -33.093,-11.493 -32.393,-11.493 -31.693,-11.493 -30.993,-11.493 -30.293,-11.493 -29.593,-11.493 -28.893,-11.493 -28.193,-11.493 -27.493,-11.493 -26.793,-11.493 -26.093,-11.493 -25.393,-11.493 -24.693,-11.493 -23.993,-11.493 -23.293,-11.493 -22.593,-11.493 -21.893,-11.493 -21.193,-11.493 -20.493,-11.493 -19.793,-11.493 -19.093,-11.493 -18.393,-11.493 -17.693,-11.493 -16.993,-11.493 -16.293,-11.493 -15.593,-11.493 -14.893,-11.493 -14.193,-11.493 -13.493,-11.493 -12.793,-11.493 -12.093,-11.493 -11.393,-11.493 -10.693,-11.493 -9.993,-11.493 -9.293,-11.493 -7.893,-11.493 11.707,-11.493 12.407,-11.493 13.107,-11.493 13.807,-11.493 14.507,-11.493 15.207,-11.493 15.907,-11.493 16.607,-11.493 21.507,-11.493 22.207,-11.493 22.907,-11.493 23.607,-11.493 24.307,-11.493 25.007,-11.493 25.707,-11.493 26.407,-11.493 32.007,-11.493 37.607,-11.493 38.307,-11.493 39.007,-11.493 39.707,-11.493 40.407,-11.493 -40.443,-10.793 -39.743,-10.793 -39.043,-10.793 -38.343,-10.793 -37.643,-10.793 -36.943,-10.793 -36.243,-10.793 -35.543,-10.793 -34.843,-10.793 -34.143,-10.793 -33.443,-10.793 -32.743,-10.793 -32.043,-10.793 -31.343,-10.793 -30.643,-10.793 -29.943,-10.793 -29.243,-10.793 -28.543,-10.793 -27.843,-10.793 -27.143,-10.793 -26.443,-10.793 -25.743,-10.793 -25.043,-10.793 -24.343,-10.793 -23.643,-10.793 -22.943,-10.793 -22.243,-10.793 -21.543,-10.793 -20.843,-10.793 -20.143,-10.793 -19.443,-10.793 -18.743,-10.793 -18.043,-10.793 -17.343,-10.793 -16.643,-10.793 -15.943,-10.793 -15.243,-10.793 -14.543,-10.793 -13.843,-10.793 -13.143,-10.793 -12.443,-10.793 -11.743,-10.793 -11.043,-10.793 -10.343,-10.793 7.157,-10.793 21.157,-10.793 21.857,-10.793 22.557,-10.793 23.257,-10.793 23.957,-10.793 24.657,-10.793 25.357,-10.793 26.057,-10.793 26.757,-10.793 31.657,-10.793 32.357,-10.793 37.257,-10.793 37.957,-10.793 38.657,-10.793 39.357,-10.793 40.057,-10.793 -40.093,-10.093 -39.393,-10.093 -38.693,-10.093 -37.993,-10.093 -37.293,-10.093 -36.593,-10.093 -35.893,-10.093 -35.193,-10.093 -34.493,-10.093 -33.793,-10.093 -33.093,-10.093 -32.393,-10.093 -31.693,-10.093 -30.993,-10.093 -30.293,-10.093 -29.593,-10.093 -28.893,-10.093 -28.193,-10.093 -27.493,-10.093 -26.793,-10.093 -26.093,-10.093 -25.393,-10.093 -24.693,-10.093 -23.993,-10.093 -23.293,-10.093 -22.593,-10.093 -21.893,-10.093 -21.193,-10.093 -20.493,-10.093 -19.793,-10.093 -19.093,-10.093 -18.393,-10.093 -17.693,-10.093 -16.993,-10.093 -16.293,-10.093 -15.593,-10.093 -14.893,-10.093 -14.193,-10.093 -13.493,-10.093 -12.793,-10.093 -12.093,-10.093 -11.393,-10.093 -10.693,-10.093 20.107,-10.093 20.807,-10.093 21.507,-10.093 22.207,-10.093 22.907,-10.093 23.607,-10.093 24.307,-10.093 25.007,-10.093 25.707,-10.093 26.407,-10.093 27.107,-10.093 27.807,-10.093 28.507,-10.093 29.907,-10.093 30.607,-10.093 31.307,-10.093 32.007,-10.093 37.607,-10.093 38.307,-10.093 39.007,-10.093 39.707,-10.093 40.407,-10.093 -40.443,-9.393 -39.743,-9.393 -39.043,-9.393 -38.343,-9.393 -37.643,-9.393 -36.943,-9.393 -36.243,-9.393 -35.543,-9.393 -34.843,-9.393 -34.143,-9.393 -33.443,-9.393 -32.743,-9.393 -32.043,-9.393 -31.343,-9.393 -30.643,-9.393 -29.943,-9.393 -29.243,-9.393 -28.543,-9.393 -27.843,-9.393 -27.143,-9.393 -26.443,-9.393 -25.743,-9.393 -25.043,-9.393 -24.343,-9.393 -23.643,-9.393 -22.943,-9.393 -22.243,-9.393 -21.543,-9.393 -20.843,-9.393 -20.143,-9.393 -19.443,-9.393 -18.743,-9.393 -18.043,-9.393 -17.343,-9.393 -16.643,-9.393 -15.943,-9.393 -15.243,-9.393 -14.543,-9.393 -13.843,-9.393 -13.143,-9.393 -12.443,-9.393 -11.743,-9.393 -11.043,-9.393 -10.343,-9.393 19.757,-9.393 20.457,-9.393 21.157,-9.393 21.857,-9.393 22.557,-9.393 23.257,-9.393 23.957,-9.393 24.657,-9.393 25.357,-9.393 26.057,-9.393 26.757,-9.393 31.657,-9.393 32.357,-9.393 37.257,-9.393 37.957,-9.393 38.657,-9.393 39.357,-9.393 40.057,-9.393 -40.093,-8.693 -39.393,-8.693 -38.693,-8.693 -37.993,-8.693 -37.293,-8.693 -36.593,-8.693 -35.893,-8.693 -35.193,-8.693 -34.493,-8.693 -33.793,-8.693 -33.093,-8.693 -32.393,-8.693 -31.693,-8.693 -30.993,-8.693 -30.293,-8.693 -29.593,-8.693 -28.893,-8.693 -28.193,-8.693 -27.493,-8.693 -26.793,-8.693 -26.093,-8.693 -25.393,-8.693 -24.693,-8.693 -23.993,-8.693 -23.293,-8.693 -22.593,-8.693 -21.893,-8.693 -21.193,-8.693 -20.493,-8.693 -19.793,-8.693 -19.093,-8.693 -18.393,-8.693 -17.693,-8.693 -16.993,-8.693 -16.293,-8.693 -15.593,-8.693 -14.893,-8.693 -14.193,-8.693 -13.493,-8.693 -12.793,-8.693 -12.093,-8.693 -11.393,-8.693 -10.693,-8.693 -9.993,-8.693 18.707,-8.693 19.407,-8.693 20.107,-8.693 20.807,-8.693 21.507,-8.693 22.207,-8.693 22.907,-8.693 23.607,-8.693 24.307,-8.693 25.007,-8.693 25.707,-8.693 26.407,-8.693 27.107,-8.693 32.007,-8.693 37.607,-8.693 38.307,-8.693 39.007,-8.693 39.707,-8.693 40.407,-8.693 -40.443,-7.993 -39.743,-7.993 -39.043,-7.993 -38.343,-7.993 -37.643,-7.993 -36.943,-7.993 -36.243,-7.993 -35.543,-7.993 -34.843,-7.993 -34.143,-7.993 -33.443,-7.993 -32.743,-7.993 -32.043,-7.993 -31.343,-7.993 -30.643,-7.993 -29.943,-7.993 -29.243,-7.993 -28.543,-7.993 -27.843,-7.993 -27.143,-7.993 -26.443,-7.993 -25.743,-7.993 -25.043,-7.993 -24.343,-7.993 -23.643,-7.993 -22.943,-7.993 -22.243,-7.993 -21.543,-7.993 -20.843,-7.993 -20.143,-7.993 -19.443,-7.993 -18.743,-7.993 -18.043,-7.993 -17.343,-7.993 -16.643,-7.993 -15.943,-7.993 -15.243,-7.993 -14.543,-7.993 -13.843,-7.993 -13.143,-7.993 -12.443,-7.993 -11.743,-7.993 -11.043,-7.993 -10.343,-7.993 -9.643,-7.993 -8.943,-7.993 -8.243,-7.993 32.357,-7.993 37.257,-7.993 37.957,-7.993 38.657,-7.993 39.357,-7.993 40.057,-7.993 -40.093,-7.293 -39.393,-7.293 -38.693,-7.293 -37.993,-7.293 -37.293,-7.293 -36.593,-7.293 -35.893,-7.293 -35.193,-7.293 -34.493,-7.293 -33.793,-7.293 -33.093,-7.293 -32.393,-7.293 -31.693,-7.293 -30.993,-7.293 -30.293,-7.293 -29.593,-7.293 -28.893,-7.293 -28.193,-7.293 -27.493,-7.293 -26.793,-7.293 -26.093,-7.293 -25.393,-7.293 -24.693,-7.293 -23.993,-7.293 -23.293,-7.293 -22.593,-7.293 -21.893,-7.293 -21.193,-7.293 -20.493,-7.293 -19.793,-7.293 -19.093,-7.293 -18.393,-7.293 -17.693,-7.293 -16.993,-7.293 -16.293,-7.293 -15.593,-7.293 -14.893,-7.293 -14.193,-7.293 -13.493,-7.293 -12.793,-7.293 -12.093,-7.293 -11.393,-7.293 -10.693,-7.293 -9.993,-7.293 33.407,-7.293 34.107,-7.293 34.807,-7.293 35.507,-7.293 36.207,-7.293 36.907,-7.293 37.607,-7.293 38.307,-7.293 39.007,-7.293 39.707,-7.293 40.407,-7.293 -40.443,-6.593 -39.743,-6.593 -39.043,-6.593 -38.343,-6.593 -37.643,-6.593 -36.943,-6.593 -36.243,-6.593 -35.543,-6.593 -34.843,-6.593 -34.143,-6.593 -33.443,-6.593 -32.743,-6.593 -32.043,-6.593 -31.343,-6.593 -30.643,-6.593 -29.943,-6.593 -29.243,-6.593 -28.543,-6.593 -27.843,-6.593 -27.143,-6.593 -26.443,-6.593 -25.743,-6.593 -25.043,-6.593 -24.343,-6.593 -23.643,-6.593 -22.943,-6.593 -22.243,-6.593 -21.543,-6.593 -20.843,-6.593 -20.143,-6.593 -19.443,-6.593 -18.743,-6.593 -18.043,-6.593 -17.343,-6.593 -16.643,-6.593 -15.943,-6.593 -15.243,-6.593 -14.543,-6.593 -13.843,-6.593 -13.143,-6.593 -12.443,-6.593 -11.743,-6.593 -11.043,-6.593 -10.343,-6.593 33.757,-6.593 34.457,-6.593 35.157,-6.593 35.857,-6.593 36.557,-6.593 37.257,-6.593 37.957,-6.593 38.657,-6.593 39.357,-6.593 40.057,-6.593 -40.093,-5.893 -39.393,-5.893 -38.693,-5.893 -37.993,-5.893 -37.293,-5.893 -36.593,-5.893 -35.893,-5.893 -35.193,-5.893 -34.493,-5.893 -33.793,-5.893 -33.093,-5.893 -32.393,-5.893 -31.693,-5.893 -30.993,-5.893 -30.293,-5.893 -29.593,-5.893 -28.893,-5.893 -28.193,-5.893 -27.493,-5.893 -26.793,-5.893 -26.093,-5.893 -25.393,-5.893 -24.693,-5.893 -23.993,-5.893 -23.293,-5.893 -22.593,-5.893 -21.893,-5.893 -21.193,-5.893 -20.493,-5.893 -19.793,-5.893 -19.093,-5.893 -18.393,-5.893 -17.693,-5.893 -16.993,-5.893 -16.293,-5.893 -15.593,-5.893 -14.893,-5.893 -14.193,-5.893 -13.493,-5.893 -12.793,-5.893 -12.093,-5.893 -11.393,-5.893 -10.693,-5.893 34.807,-5.893 35.507,-5.893 36.207,-5.893 36.907,-5.893 37.607,-5.893 38.307,-5.893 39.007,-5.893 39.707,-5.893 40.407,-5.893 -40.443,-5.193 -39.743,-5.193 -39.043,-5.193 -38.343,-5.193 -37.643,-5.193 -36.943,-5.193 -36.243,-5.193 -35.543,-5.193 -34.843,-5.193 -34.143,-5.193 -33.443,-5.193 -32.743,-5.193 -32.043,-5.193 -31.343,-5.193 -30.643,-5.193 -29.943,-5.193 -29.243,-5.193 -28.543,-5.193 -27.843,-5.193 -27.143,-5.193 -26.443,-5.193 -25.743,-5.193 -25.043,-5.193 -24.343,-5.193 -23.643,-5.193 -22.943,-5.193 -22.243,-5.193 -21.543,-5.193 -20.843,-5.193 -20.143,-5.193 -19.443,-5.193 -18.743,-5.193 -18.043,-5.193 -17.343,-5.193 -16.643,-5.193 -15.943,-5.193 -15.243,-5.193 -14.543,-5.193 -13.843,-5.193 -13.143,-5.193 -12.443,-5.193 -11.743,-5.193 -11.043,-5.193 -10.343,-5.193 7.157,-5.193 35.157,-5.193 35.857,-5.193 36.557,-5.193 37.257,-5.193 37.957,-5.193 38.657,-5.193 39.357,-5.193 40.057,-5.193 -40.093,-4.493 -39.393,-4.493 -38.693,-4.493 -37.993,-4.493 -37.293,-4.493 -36.593,-4.493 -35.893,-4.493 -35.193,-4.493 -34.493,-4.493 -33.793,-4.493 -33.093,-4.493 -32.393,-4.493 -31.693,-4.493 -30.993,-4.493 -30.293,-4.493 -29.593,-4.493 -28.893,-4.493 -28.193,-4.493 -27.493,-4.493 -26.793,-4.493 -26.093,-4.493 -25.393,-4.493 -24.693,-4.493 -23.993,-4.493 -23.293,-4.493 -22.593,-4.493 -21.893,-4.493 -21.193,-4.493 -20.493,-4.493 -19.793,-4.493 -19.093,-4.493 -18.393,-4.493 -17.693,-4.493 -16.993,-4.493 -16.293,-4.493 -15.593,-4.493 -14.893,-4.493 -14.193,-4.493 -13.493,-4.493 -12.793,-4.493 -12.093,-4.493 -11.393,-4.493 -10.693,-4.493 -9.993,-4.493 -9.293,-4.493 -7.893,-4.493 36.907,-4.493 37.607,-4.493 38.307,-4.493 39.007,-4.493 39.707,-4.493 40.407,-4.493 -40.443,-3.793 -39.743,-3.793 -39.043,-3.793 -38.343,-3.793 -37.643,-3.793 -36.943,-3.793 -36.243,-3.793 -35.543,-3.793 -34.843,-3.793 -34.143,-3.793 -33.443,-3.793 -32.743,-3.793 -32.043,-3.793 -31.343,-3.793 -30.643,-3.793 -29.943,-3.793 -29.243,-3.793 -28.543,-3.793 -27.843,-3.793 -27.143,-3.793 -26.443,-3.793 -25.743,-3.793 -25.043,-3.793 -24.343,-3.793 -23.643,-3.793 -22.943,-3.793 -22.243,-3.793 -21.543,-3.793 -20.843,-3.793 -20.143,-3.793 -19.443,-3.793 -18.743,-3.793 -18.043,-3.793 -17.343,-3.793 -16.643,-3.793 -15.943,-3.793 -15.243,-3.793 -14.543,-3.793 -13.843,-3.793 -13.143,-3.793 -12.443,-3.793 -11.743,-3.793 -11.043,-3.793 -10.343,-3.793 -9.643,-3.793 -8.943,-3.793 -8.243,-3.793 36.557,-3.793 37.257,-3.793 37.957,-3.793 38.657,-3.793 39.357,-3.793 40.057,-3.793 -40.093,-3.093 -39.393,-3.093 -38.693,-3.093 -37.993,-3.093 -37.293,-3.093 -36.593,-3.093 -35.893,-3.093 -35.193,-3.093 -34.493,-3.093 -33.793,-3.093 -33.093,-3.093 -32.393,-3.093 -31.693,-3.093 -30.993,-3.093 -30.293,-3.093 -29.593,-3.093 -28.893,-3.093 -28.193,-3.093 -27.493,-3.093 -26.793,-3.093 -26.093,-3.093 -25.393,-3.093 -24.693,-3.093 -23.993,-3.093 -23.293,-3.093 -22.593,-3.093 -21.893,-3.093 -21.193,-3.093 -20.493,-3.093 -19.793,-3.093 -19.093,-3.093 -18.393,-3.093 -17.693,-3.093 -16.993,-3.093 -16.293,-3.093 -15.593,-3.093 -14.893,-3.093 -14.193,-3.093 -13.493,-3.093 -12.793,-3.093 -12.093,-3.093 -11.393,-3.093 -10.693,-3.093 -9.993,-3.093 36.907,-3.093 37.607,-3.093 38.307,-3.093 39.007,-3.093 39.707,-3.093 40.407,-3.093 -40.443,-2.393 -39.743,-2.393 -39.043,-2.393 -38.343,-2.393 -37.643,-2.393 -36.943,-2.393 -36.243,-2.393 -35.543,-2.393 -34.843,-2.393 -34.143,-2.393 -33.443,-2.393 -32.743,-2.393 -32.043,-2.393 -31.343,-2.393 -30.643,-2.393 -29.943,-2.393 -29.243,-2.393 -28.543,-2.393 -27.843,-2.393 -27.143,-2.393 -26.443,-2.393 -25.743,-2.393 -25.043,-2.393 -24.343,-2.393 -23.643,-2.393 -22.943,-2.393 -22.243,-2.393 -21.543,-2.393 -20.843,-2.393 -20.143,-2.393 -19.443,-2.393 -18.743,-2.393 -18.043,-2.393 -17.343,-2.393 -16.643,-2.393 -15.943,-2.393 -15.243,-2.393 -14.543,-2.393 -13.843,-2.393 -13.143,-2.393 -12.443,-2.393 -11.743,-2.393 -11.043,-2.393 -10.343,-2.393 36.557,-2.393 37.257,-2.393 37.957,-2.393 38.657,-2.393 39.357,-2.393 40.057,-2.393 -40.093,-1.693 -39.393,-1.693 -38.693,-1.693 -37.993,-1.693 -37.293,-1.693 -36.593,-1.693 -35.893,-1.693 -35.193,-1.693 -34.493,-1.693 -33.793,-1.693 -33.093,-1.693 -32.393,-1.693 -31.693,-1.693 -30.993,-1.693 -30.293,-1.693 -29.593,-1.693 -28.893,-1.693 -28.193,-1.693 -27.493,-1.693 -26.793,-1.693 -26.093,-1.693 -25.393,-1.693 -24.693,-1.693 -23.993,-1.693 -23.293,-1.693 -22.593,-1.693 -21.893,-1.693 -21.193,-1.693 -20.493,-1.693 -19.793,-1.693 -19.093,-1.693 -18.393,-1.693 -17.693,-1.693 -16.993,-1.693 -16.293,-1.693 -15.593,-1.693 -14.893,-1.693 -14.193,-1.693 -13.493,-1.693 -12.793,-1.693 -12.093,-1.693 -11.393,-1.693 -10.693,-1.693 36.907,-1.693 37.607,-1.693 38.307,-1.693 39.007,-1.693 39.707,-1.693 40.407,-1.693 -40.443,-0.993 -39.743,-0.993 -39.043,-0.993 -38.343,-0.993 -37.643,-0.993 -36.943,-0.993 -36.243,-0.993 -35.543,-0.993 -34.843,-0.993 -34.143,-0.993 -33.443,-0.993 -32.743,-0.993 -32.043,-0.993 -31.343,-0.993 -30.643,-0.993 -29.943,-0.993 -29.243,-0.993 -28.543,-0.993 -27.843,-0.993 -27.143,-0.993 -26.443,-0.993 -25.743,-0.993 -25.043,-0.993 -24.343,-0.993 -23.643,-0.993 -22.943,-0.993 -22.243,-0.993 -21.543,-0.993 -20.843,-0.993 -20.143,-0.993 -19.443,-0.993 -18.743,-0.993 -18.043,-0.993 -17.343,-0.993 -16.643,-0.993 -15.943,-0.993 -15.243,-0.993 -14.543,-0.993 -13.843,-0.993 -13.143,-0.993 -12.443,-0.993 -11.743,-0.993 -11.043,-0.993 -10.343,-0.993 -6.843,-0.993 36.557,-0.993 37.257,-0.993 37.957,-0.993 38.657,-0.993 39.357,-0.993 40.057,-0.993 -40.093,-0.293 -39.393,-0.293 -38.693,-0.293 -37.993,-0.293 -37.293,-0.293 -36.593,-0.293 -35.893,-0.293 -35.193,-0.293 -34.493,-0.293 -33.793,-0.293 -33.093,-0.293 -32.393,-0.293 -31.693,-0.293 -30.993,-0.293 -30.293,-0.293 -29.593,-0.293 -28.893,-0.293 -28.193,-0.293 -27.493,-0.293 -26.793,-0.293 -26.093,-0.293 -25.393,-0.293 -24.693,-0.293 -23.993,-0.293 -23.293,-0.293 -22.593,-0.293 -21.893,-0.293 -21.193,-0.293 -20.493,-0.293 -19.793,-0.293 -19.093,-0.293 -18.393,-0.293 -17.693,-0.293 -16.993,-0.293 -16.293,-0.293 -15.593,-0.293 -14.893,-0.293 -14.193,-0.293 -13.493,-0.293 -12.793,-0.293 -12.093,-0.293 -11.393,-0.293 -10.693,-0.293 -9.993,-0.293 -9.293,-0.293 -8.593,-0.293 -7.893,-0.293 36.907,-0.293 37.607,-0.293 38.307,-0.293 39.007,-0.293 39.707,-0.293 40.407,-0.293 -40.443,0.407 -39.743,0.407 -39.043,0.407 -38.343,0.407 -37.643,0.407 -36.943,0.407 -36.243,0.407 -35.543,0.407 -34.843,0.407 -34.143,0.407 -33.443,0.407 -32.743,0.407 -32.043,0.407 -31.343,0.407 -30.643,0.407 -29.943,0.407 -29.243,0.407 -28.543,0.407 -27.843,0.407 -27.143,0.407 -26.443,0.407 -25.743,0.407 -25.043,0.407 -24.343,0.407 -23.643,0.407 -22.943,0.407 -22.243,0.407 -21.543,0.407 -20.843,0.407 -20.143,0.407 -19.443,0.407 -18.743,0.407 -18.043,0.407 -17.343,0.407 -16.643,0.407 -15.943,0.407 -15.243,0.407 -14.543,0.407 -13.843,0.407 -13.143,0.407 -12.443,0.407 -11.743,0.407 -11.043,0.407 -10.343,0.407 -9.643,0.407 -8.943,0.407 -8.243,0.407 36.557,0.407 37.257,0.407 37.957,0.407 38.657,0.407 39.357,0.407 40.057,0.407 -40.093,1.107 -39.393,1.107 -38.693,1.107 -37.993,1.107 -37.293,1.107 -36.593,1.107 -35.893,1.107 -35.193,1.107 -34.493,1.107 -33.793,1.107 -33.093,1.107 -32.393,1.107 -31.693,1.107 -30.993,1.107 -30.293,1.107 -29.593,1.107 -28.893,1.107 -28.193,1.107 -27.493,1.107 -26.793,1.107 -26.093,1.107 -25.393,1.107 -24.693,1.107 -23.993,1.107 -23.293,1.107 -22.593,1.107 -21.893,1.107 -21.193,1.107 -20.493,1.107 -19.793,1.107 -19.093,1.107 -18.393,1.107 -17.693,1.107 -16.993,1.107 -16.293,1.107 -15.593,1.107 -14.893,1.107 -14.193,1.107 -13.493,1.107 -12.793,1.107 -12.093,1.107 -11.393,1.107 -10.693,1.107 -9.993,1.107 27.107,1.107 36.907,1.107 37.607,1.107 38.307,1.107 39.007,1.107 39.707,1.107 40.407,1.107 -40.443,1.807 -39.743,1.807 -39.043,1.807 -38.343,1.807 -37.643,1.807 -36.943,1.807 -36.243,1.807 -35.543,1.807 -34.843,1.807 -34.143,1.807 -33.443,1.807 -32.743,1.807 -32.043,1.807 -31.343,1.807 -30.643,1.807 -29.943,1.807 -29.243,1.807 -28.543,1.807 -27.843,1.807 -27.143,1.807 -26.443,1.807 -25.743,1.807 -25.043,1.807 -24.343,1.807 -23.643,1.807 -22.943,1.807 -22.243,1.807 -21.543,1.807 -20.843,1.807 -20.143,1.807 -19.443,1.807 -18.743,1.807 -18.043,1.807 -17.343,1.807 -16.643,1.807 -15.943,1.807 -15.243,1.807 -14.543,1.807 -13.843,1.807 -13.143,1.807 -12.443,1.807 -11.743,1.807 -11.043,1.807 -10.343,1.807 14.857,1.807 36.557,1.807 37.257,1.807 37.957,1.807 38.657,1.807 39.357,1.807 40.057,1.807 -40.093,2.507 -39.393,2.507 -38.693,2.507 -37.993,2.507 -37.293,2.507 -36.593,2.507 -35.893,2.507 -35.193,2.507 -34.493,2.507 -33.793,2.507 -33.093,2.507 -32.393,2.507 -31.693,2.507 -30.993,2.507 -30.293,2.507 -29.593,2.507 -28.893,2.507 -28.193,2.507 -27.493,2.507 -26.793,2.507 -26.093,2.507 -25.393,2.507 -24.693,2.507 -23.993,2.507 -23.293,2.507 -22.593,2.507 -21.893,2.507 -21.193,2.507 -20.493,2.507 -19.793,2.507 -19.093,2.507 -18.393,2.507 -17.693,2.507 -16.993,2.507 -16.293,2.507 -15.593,2.507 -14.893,2.507 -14.193,2.507 -13.493,2.507 -12.793,2.507 -12.093,2.507 -11.393,2.507 -10.693,2.507 13.807,2.507 14.507,2.507 27.107,2.507 31.307,2.507 36.207,2.507 36.907,2.507 37.607,2.507 38.307,2.507 39.007,2.507 39.707,2.507 40.407,2.507 -40.443,3.207 -39.743,3.207 -39.043,3.207 -38.343,3.207 -37.643,3.207 -36.943,3.207 -36.243,3.207 -35.543,3.207 -34.843,3.207 -34.143,3.207 -33.443,3.207 -32.743,3.207 -32.043,3.207 -31.343,3.207 -30.643,3.207 -29.943,3.207 -29.243,3.207 -28.543,3.207 -27.843,3.207 -27.143,3.207 -26.443,3.207 -25.743,3.207 -25.043,3.207 -24.343,3.207 -23.643,3.207 -22.943,3.207 -22.243,3.207 -21.543,3.207 -20.843,3.207 -20.143,3.207 -19.443,3.207 -18.743,3.207 -18.043,3.207 -17.343,3.207 -16.643,3.207 -15.943,3.207 -15.243,3.207 -14.543,3.207 -13.843,3.207 -13.143,3.207 -12.443,3.207 -11.743,3.207 -11.043,3.207 -10.343,3.207 -9.643,3.207 13.457,3.207 14.157,3.207 14.857,3.207 31.657,3.207 36.557,3.207 37.257,3.207 37.957,3.207 38.657,3.207 39.357,3.207 40.057,3.207 -40.093,3.907 -39.393,3.907 -38.693,3.907 -37.993,3.907 -37.293,3.907 -36.593,3.907 -35.893,3.907 -35.193,3.907 -34.493,3.907 -33.793,3.907 -33.093,3.907 -32.393,3.907 -31.693,3.907 -30.993,3.907 -30.293,3.907 -29.593,3.907 -28.893,3.907 -28.193,3.907 -27.493,3.907 -26.793,3.907 -26.093,3.907 -25.393,3.907 -24.693,3.907 -23.993,3.907 -23.293,3.907 -22.593,3.907 -21.893,3.907 -21.193,3.907 -20.493,3.907 -19.793,3.907 -19.093,3.907 -18.393,3.907 -17.693,3.907 -16.993,3.907 -16.293,3.907 -15.593,3.907 -14.893,3.907 -14.193,3.907 -13.493,3.907 -12.793,3.907 -12.093,3.907 -11.393,3.907 -10.693,3.907 -9.993,3.907 -9.293,3.907 -8.593,3.907 -7.893,3.907 12.407,3.907 13.107,3.907 13.807,3.907 14.507,3.907 27.107,3.907 31.307,3.907 32.007,3.907 32.707,3.907 36.907,3.907 37.607,3.907 38.307,3.907 39.007,3.907 39.707,3.907 40.407,3.907 -40.443,4.607 -39.743,4.607 -39.043,4.607 -38.343,4.607 -37.643,4.607 -36.943,4.607 -36.243,4.607 -35.543,4.607 -34.843,4.607 -34.143,4.607 -33.443,4.607 -32.743,4.607 -32.043,4.607 -31.343,4.607 -30.643,4.607 -29.943,4.607 -29.243,4.607 -28.543,4.607 -27.843,4.607 -27.143,4.607 -26.443,4.607 -25.743,4.607 -25.043,4.607 -24.343,4.607 -23.643,4.607 -22.943,4.607 -22.243,4.607 -21.543,4.607 -20.843,4.607 -20.143,4.607 -19.443,4.607 -18.743,4.607 -18.043,4.607 -17.343,4.607 -16.643,4.607 -15.943,4.607 -15.243,4.607 -14.543,4.607 -13.843,4.607 -13.143,4.607 -12.443,4.607 -11.743,4.607 -11.043,4.607 -10.343,4.607 -9.643,4.607 12.057,4.607 12.757,4.607 13.457,4.607 14.157,4.607 14.857,4.607 27.457,4.607 31.657,4.607 32.357,4.607 36.557,4.607 37.257,4.607 37.957,4.607 38.657,4.607 39.357,4.607 40.057,4.607 -40.093,5.307 -39.393,5.307 -38.693,5.307 -37.993,5.307 -37.293,5.307 -36.593,5.307 -35.893,5.307 -35.193,5.307 -34.493,5.307 -33.793,5.307 -33.093,5.307 -32.393,5.307 -31.693,5.307 -30.993,5.307 -30.293,5.307 -29.593,5.307 -28.893,5.307 -28.193,5.307 -27.493,5.307 -26.793,5.307 -26.093,5.307 -25.393,5.307 -24.693,5.307 -23.993,5.307 -23.293,5.307 -22.593,5.307 -21.893,5.307 -21.193,5.307 -20.493,5.307 -19.793,5.307 -19.093,5.307 -18.393,5.307 -17.693,5.307 -16.993,5.307 -16.293,5.307 -15.593,5.307 -14.893,5.307 -14.193,5.307 -13.493,5.307 -12.793,5.307 -12.093,5.307 -11.393,5.307 -10.693,5.307 -9.993,5.307 10.307,5.307 11.007,5.307 11.707,5.307 12.407,5.307 13.107,5.307 13.807,5.307 14.507,5.307 27.107,5.307 27.807,5.307 28.507,5.307